# Altium PCB Layout_Dendrometro.PcbDoc (part 2 of 2)
Units mm, origin at the board's own origin, x right, y up, seen from the top; angles counter-clockwise.
Board outline 70 x 70 mm, 4 copper layers (L1 - TOP (Sig), L2 (GND), L3 (GND), L4 - BOT (Sig)), stack 0.603 mm thick; 138 components, 78 nets, 374 pads, 106 vias.
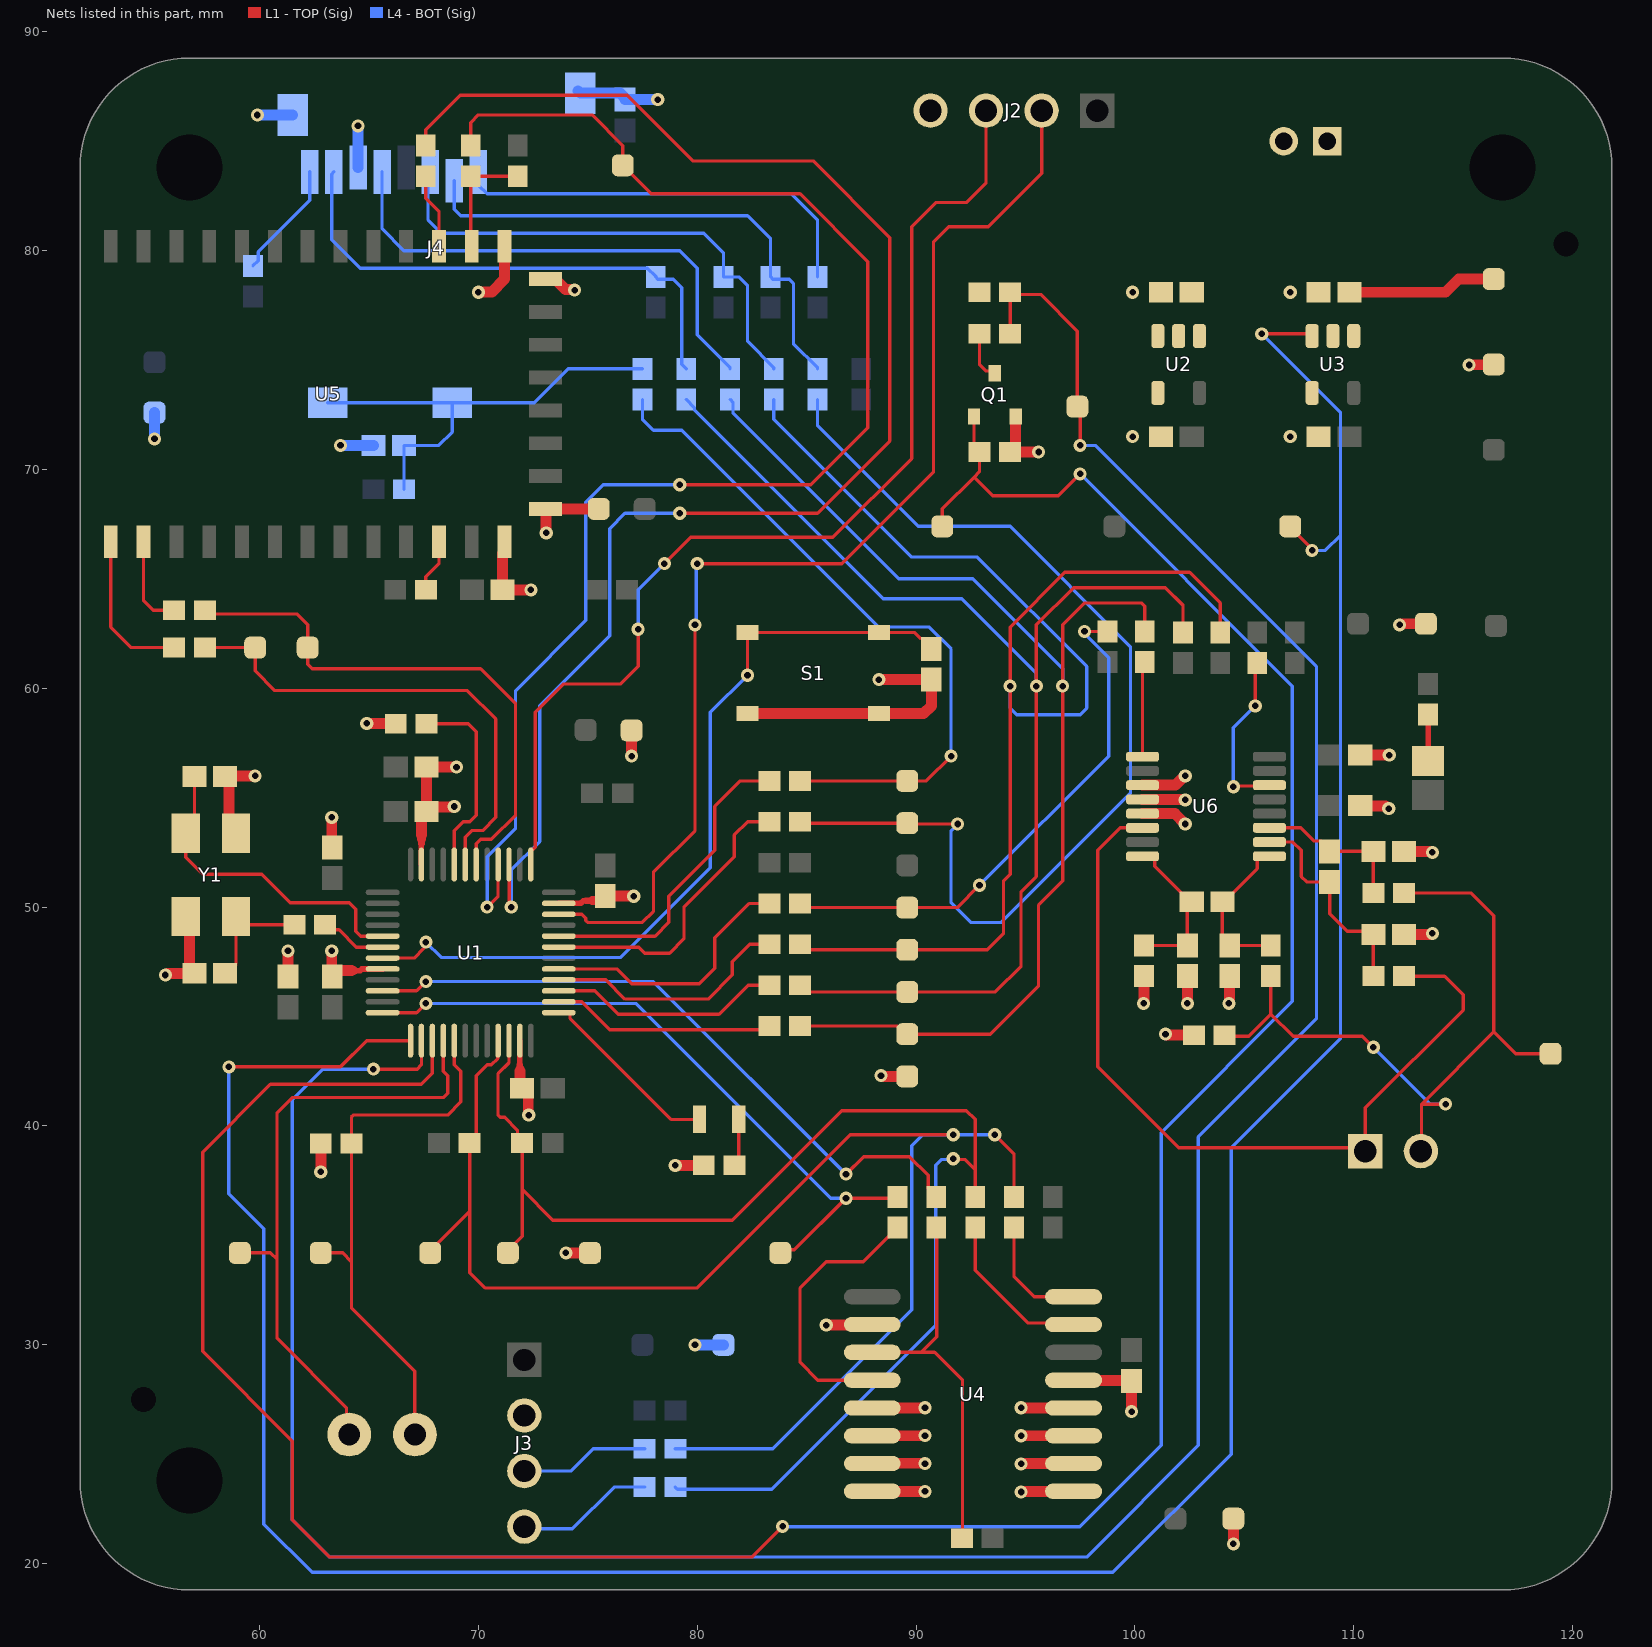
[diagram p4: the nets of this part, all layers, seen from the top]

## Via types
v1: diameter 0.6, hole 0.3, L1 - TOP (Sig) to L4 - BOT (Sig), tented top, 106 vias

## Nets (pads, with @x,y where several pads share a name; then routed paths per layer and width w, separated by ;. In a path a pad name is that pad's centre, name@x,y a point inside that pad or via, vN(x,y) a via of type N, cw(c..) or ccw(c..) an arc to the next point about the centre after c; other vN are vias at no path point) (continued)
ADS_DRDY: JP23.1 U6.14 | length 7.8
  L1 - TOP (Sig) w0.152: v1(104.5,55.5) 104.537,55.537 106.113,55.537 U6.14@106.15,55.575 ; v1(105.5,59.2) 105.5,61.05 JP23.1@105.6,61.15
  L4 - BOT (Sig) w0.152: v1(104.5,55.5) 104.5,58.2 v1(105.5,59.2)
ADS_SCLK: JP24.2 U6.1 | length 4.4
  L1 - TOP (Sig) w0.152: U6.1@100.35,56.875 100.35,61.1 JP24.2@100.45,61.2
AIN_N: C22.2 C26.1 R31.2 U6.11 | length 7.1
  L1 - TOP (Sig) w0.152: U6.11@106.15,53.625 107.575,53.625 108.176,53.024 108.501,53.024 108.9,52.625 C22.2@108.9,52.55 C26.1@110.9,52.55 R31.2@110.9,50.65
AIN_P: C22.1 C25.1 R27.2 U6.10 | length 10
  L1 - TOP (Sig) w0.152: U6.10@106.15,52.975 107.225,52.975 107.6,52.6 107.6,51.4 107.85,51.15 C22.1@108.9,51.15 108.9,49.7 109.7,48.9 110.75,48.9 C25.1@110.9,48.75 R27.2@110.9,46.85
BAT_SENSE: R1.2 R2.1 TP4.1 U1.14 | length 134.9
  L1 - TOP (Sig) w0.152: v1(65.2,42.6) 67.2,42.6 67.4,42.8 U1.14@67.4,43.9 ; R2.1@94.3,76.2 R1.2@94.3,78.1 94.4,78 95.7,78 97.375,76.325 TP4.1@97.375,72.875 97.5,72.75 v1(97.5,71.1)
  L4 - BOT (Sig) w0.152: v1(65.2,42.6) 62.889,42.6 62.8,42.511 62.8,42.5 61.5,41.2 61.5,22 63.2,20.3 97.8,20.3 102.9,25.4 102.9,39.5 108.3,44.9 108.3,61 98.2,71.1 v1(97.5,71.1)
BLE_EN: JP12.2 TP20.1 U1.40 | length 67.1
  L1 - TOP (Sig) w0.152: JP12.2@69.649,84.8 69.649,85.849 70,86.2 75.2,86.2 76.6,84.8 TP20.1@76.6,83.9 77.9,82.6 84.7,82.6 87.8,79.5 87.8,71.9 85.2,69.3 v1(79.2,69.3) ; v1(70.4,50) 70.9,50.5 U1.40@70.9,51.95
  L4 - BOT (Sig) w0.152: v1(70.4,50) 70.4,52.3 71.7,53.6 71.7,59.9 74.9,63.1 74.9,68.5 75.7,69.3 v1(79.2,69.3)
BLE_STATE: JP14.2 U1.39 | length 70.2
  L1 - TOP (Sig) w0.152: JP14.2@67.6,84.8 67.6,85.529 69.171,87.1 76.8,87.1 79.8,84.1 85.3,84.1 88.8,80.6 88.8,71.3 85.5,68 v1(79.2,68) ; U1.39@71.4,51.95 71.419,51.931 71.419,50.081 v1(71.5,50)
  L4 - BOT (Sig) w0.152: v1(71.5,50) 71.5,51.7 72.8,53 72.8,59.2 76,62.4 76,67.3 76.7,68 v1(79.2,68)
CARD_DET: JP16.2 R18.2 TP30.1 | length 31.6
  L1 - TOP (Sig) w0.152: R18.2@84.7,55.767 TP30.1@89.6,55.767 90.467,55.767 v1(91.6,56.9)
  L4 - BOT (Sig) w0.152: JP16.2@77.5,73.2 77.5,72.3 78,71.8 79.3,71.8 82.7,68.4 88.3,62.8 90.6,62.8 91.6,61.8 v1(91.6,56.9)
CARD_DET_MCU: R18.1 U1.32 | length 14.4
  L1 - TOP (Sig) w0.152: U1.32@73.675,48.675 78.075,48.675 78.7,49.3 78.7,50.5 80.8,52.6 80.8,54.6 81.967,55.767 R18.1@83.3,55.767
DEBUG_LED_A: D1.1 U1.25 | length 8.6
  L1 - TOP (Sig) w0.152: U1.25@73.675,45.175 74.144,45.175 74.189,45.13 74.189,44.911 78.8,40.3 D1.1@80.1,40.3
DEBUG_LED_K: D1.2 R32.1 | length 2.2
  L1 - TOP (Sig) w0.152: R32.1@81.7,38.2 81.9,38.4 D1.2@81.9,40.3
DL_LIM: C14.1 R4.1 Y1.3 | length 5.7
  L1 - TOP (Sig) w0.152: C14.1@58.425,46.975 58.5,46.975 58.925,47.4 Y1.3@58.925,49.575 59.3,49.2 R4.1@61.6,49.2
DS_INT: JP6.1 R8.2 U4.3 | length 17.9
  L1 - TOP (Sig) w0.152: U4.3@88,29.655 90.23,29.655 ; JP6.1@90.925,35.355 90.95,35.33 90.95,30.375 90.23,29.655 ; R8.2@92.1,21.155 92.125,21.18 92.125,28.375 90.845,29.655 90.23,29.655
DS_RST: JP9.1 U4.4 | length 12.7
  L1 - TOP (Sig) w0.152: U4.4@88,28.385 85.515,28.385 84.7,29.2 84.7,32.6 85.9,33.8 87.595,33.8 88.726,34.931 88.776,34.931 89.15,35.305 JP9.1@89.15,35.355
DS_SCL: JP5.2 U4.16 | length 5.5
  L1 - TOP (Sig) w0.152: JP5.2@94.475,35.355 94.475,33.125 95.405,32.195 U4.16@97.2,32.195
  L1 - TOP (Sig) w0.254: U4.16@97.12,32.275 U4.16@97.2,32.195
DS_SDA: JP8.2 U4.15 | length 7.5
  L1 - TOP (Sig) w0.152: JP8.2@92.7,35.355 92.7,33.4 95.1,31 97.125,31 U4.15@97.2,30.925
EN_3VA: TP7.1 U1.13 U3.3 | length 137.9
  L1 - TOP (Sig) w0.152: v1(58.6,42.7) 63.7,42.7 64.9,43.9 U1.13@66.9,43.9 ; v1(105.8,76.2) 108,76.2 U3.3@108.1,76.1 ; TP7.1@107.1,67.4 107.1,67.35 108.1,66.35 v1(108.1,66.3)
  L4 - BOT (Sig) w0.152: v1(58.6,42.7) 58.6,36.9 60.2,35.3 60.2,21.8 62.4,19.6 99,19.6 104.4,25 104.4,39 109.4,44 109.4,67 ; v1(105.8,76.2) 109.4,72.6 109.4,67 ; v1(108.1,66.3) 108.7,66.3 109.4,67
EN_BSENSE: Q1.1 R3.1 TP5.1 U1.15 | length 136.9
  L1 - TOP (Sig) w0.152: U1.15@67.9,43.9 67.9,42.4 67.4,41.9 60.5,41.9 57.4,38.8 57.4,29.7 61.5,25.6 61.5,22 63.2,20.3 82.5,20.3 v1(83.9,21.7) ; TP5.1@91.2,67.4 91.2,68.2 92.65,69.65 ; Q1.1@92.648,72.419 92.648,71.052 R3.1@92.9,70.8 92.9,69.9 92.65,69.65 ; v1(97.5,69.8) 96.5,68.8 93.5,68.8 92.65,69.65
  L4 - BOT (Sig) w0.152: v1(83.9,21.7) 83.921,21.679 97.479,21.679 101.2,25.4 101.2,39.7 107.2,45.7 107.2,60.1 v1(97.5,69.8)
EN_LIGHT_MON: R11.1 TP23.1 U1.16 | length 28.5
  L1 - TOP (Sig) w0.152: TP23.1@59.1,34.2 60.5,34.2 60.8,33.9 ; R11.1@64.1,25.9 63.971,26.029 63.971,27.129 60.8,30.3 60.8,33.9 ; U1.16@68.4,43.9 68.4,42.5 68.6,42.3 68.6,41.5 68.4,41.3 61.5,41.3 60.8,40.6 60.8,33.9
FB_AVDD: FB1.1 R26.2 | length 2.1
  L1 - TOP (Sig) w0.254: FB1.1@113.4,56.676 R26.2@113.4,58.8
GND: C1.2 C2.2 C3.2 C4.2 C5.2 C6.2 C7.2 C8.2 C9.2 C10.2 C11.2 C12.2 C13.2 C14.2 C15.2 C16.2 C17.2 C18.2 C19.2 C20.2 C23.2 C24.2 C25.2 C26.2 J1.2 J2.4 J3.2 J4.6 J4.11 J4.12 Q1.2 R3.2 R5.2 R12.2 R29.2 R30.2 R32.2 S1.3 S1.4 TP3.1 TP9.1 TP13.1 TP14.1 TP17.1 TP22.1 TP32.1 TP34.1 TP36.1 U1.8 U1.23 U1.35 U1.47 U2.2 U2.4 U3.2 U3.4 U4.2 U4.5 U4.6 U4.7 U4.8 U4.9 U4.10 U4.11 U4.12 U4.13 U5.13 U5.14 U5.21 U5.22 U6.3 U6.4 U6.5 Y1.2 Y1.4 | length 119.8
  L1 - TOP (Sig) w0.254: 64.4,47.1 64.6,47.1 64.673,47.173 65.623,47.173 U1.8@65.625,47.175 ; U1.47@67.4,51.95 67.4,52.9 ; 71.9,42.8 U1.23@71.9,43.9 ; U1.35@73.675,50.175 73.677,50.177 74.677,50.177 74.8,50.3 74.9,50.3
  L1 - TOP (Sig) w0.3: 64.3,47.1 64.4,47.1 ; 67.4,52.9 67.4,53.1 ; 71.9,42.6 71.9,42.8 ; 74.9,50.3 75.2,50.3
  L1 - TOP (Sig) w0.4: 64.2,47.1 64.3,47.1 ; 67.4,53.1 67.4,53.3 ; 71.9,42.5 71.9,42.6 ; 75.2,50.3 75.6,50.3 C10.2@75.8,50.5
  L1 - TOP (Sig) w0.5: v1(55.7,46.9) 55.727,46.9 55.802,46.975 C14.2@57.025,46.975 56.8,47.2 56.8,49.4 Y1.2@56.625,49.575 ; Y1.4@58.925,53.375 58.6,53.7 58.6,55.8 C13.2@58.425,55.975 58.437,55.988 59.788,55.988 v1(59.8,56) ; C12.2@61.3,46.825 v1(61.3,48) ; v1(62.8,37.9) R12.2@62.8,39.2 ; v1(63.3,48) 63.3,47.125 C6.2@63.325,46.825 63.325,46.875 63.55,47.1 64.2,47.1 ; v1(63.3,54.1) 63.3,53.025 C8.2@63.325,52.725 ; v1(64.9,58.4) 64.912,58.388 66.213,58.388 R5.2@66.225,58.375 ; 67.4,53.3 67.4,54.15 C7.2@67.625,54.375 ; v1(68.9,54.6) 68.881,54.581 67.831,54.581 C7.2@67.625,54.375 ; v1(69,56.4) C9.2@67.625,56.4 C7.2@67.625,54.375 ; v1(70,78.1) 70.019,78.119 70.619,78.119 71.2,78.7 U5.22@71.2,80.2 ; U5.13@71.2,66.7 71.2,66.267 71.1,66.167 C16.2@71.1,64.5 v1(72.4,64.5) ; 71.9,42.5 71.9,41.825 C11.2@72,41.725 72.056,41.725 72.281,41.5 72.281,40.519 v1(72.3,40.5) ; U5.21@73.075,78.7 73.143,78.632 73.575,78.632 73.988,78.219 74.381,78.219 v1(74.4,78.2) ; v1(73.1,67.1) 73.1,68.175 U5.14@73.075,68.2 TP22.1@75.5,68.2 ; v1(74,34.2) TP13.1@75.1,34.2 ; C10.2@75.8,50.5 v1(77.1,50.5) ; v1(77,56.9) TP9.1@77,58.075 ; v1(79,38.2) R32.2@80.3,38.2 ; S1.3@82.3,58.85 S1.4@88.3,58.85 90.35,58.85 90.7,59.2 C5.2@90.7,60.4 v1(88.3,60.4) ; v1(85.9,30.9) 85.913,30.913 87.987,30.913 U4.2@88,30.925 ; U4.8@88,23.305 88.002,23.303 90.397,23.303 v1@90.4,23.3 ; U4.7@88,24.575 88.012,24.587 90.388,24.587 v1@90.4,24.6 ; U4.6@88,25.845 90.318,25.845 90.373,25.9 v1@90.4,25.9 ; U4.5@88,27.115 88.003,27.118 90.407,27.118 v1(90.41,27.121) ; v1(88.4,42.3) 88.427,42.3 88.46,42.267 TP32.1@89.6,42.267 ; R3.2@94.3,70.8 v1(95.6,70.8) ; R3.2@94.553,71.003 Q1.2@94.553,72.419 ; v1(94.8,23.275) 94.815,23.29 97.185,23.29 U4.9@97.2,23.305 ; v1(94.8,24.558) 94.808,24.567 97.192,24.567 U4.10@97.2,24.575 U4.10@97.187,24.587 ; v1(94.8,25.842) 94.802,25.843 97.198,25.843 U4.11@97.2,25.845 ; v1(94.8,27.125) 94.81,27.115 U4.12@97.2,27.115 ; U4.13@97.2,28.385 97.215,28.37 99.835,28.37 C15.2@99.85,28.355 v1(99.85,26.95) ; U6.5@100.35,54.275 101.825,54.275 v1(102.3,53.8) ; U6.4@100.35,54.925 100.362,54.912 102.288,54.912 v1(102.3,54.9) ; U6.3@100.35,55.575 101.85,55.575 102.275,56 v1(102.3,56) ; v1(100.4,45.6) 100.408,45.608 100.408,46.842 R30.2@100.417,46.85 ; v1(101.4,44.2) 101.427,44.2 101.477,44.15 R29.2@102.7,44.15 ; v1(102.4,45.6) C23.2@102.4,46.85 ; v1(104.3,45.6) 104.3,45.627 104.333,45.66 C24.2@104.333,46.85 ; v1(104.5,20.9) TP17.1@104.5,22.055 ; C20.2@110.3,54.65 110.331,54.619 111.454,54.619 111.573,54.5 v1(111.6,54.5) ; C19.2@110.3,56.95 v1(111.623,56.95) ; v1(112.1,62.9) 112.127,62.9 112.177,62.95 TP36.1@113.3,62.95 ; C25.2@112.3,48.75 113.523,48.75 113.573,48.8 v1(113.6,48.8) ; C26.2@112.3,52.55 113.523,52.55 113.573,52.5 v1(113.6,52.5) ; v1(115.275,74.775) 115.287,74.788 116.388,74.788 TP3.1@116.4,74.8
  L4 - BOT (Sig) w0.5: v1(55.2,71.4) TP34.1@55.2,72.6 ; v1(59.9,86.2) J4.11@61.51,86.2 ; v1(63.7,71.1) C18.2@65.2,71.1 ; J4.6@64.5,83.8 v1(64.5,85.7) ; J4.12@74.56,87.3 J4.12@74.66,87.2 76.475,87.2 76.7,86.975 C17.2@76.7,86.9 v1(78.2,86.9) ; v1(79.9,30) TP14.1@81.2,30
  other v1: 90.41,23.3 90.41,24.574 90.41,25.848 99.9,71.5 107.1,71.5 99.9,78.1 107.1,78.1
HM10_EN: JP12.1 R10.2 U5.23 | length 5.4
  L1 - TOP (Sig) w0.152: U5.23@69.7,80.2 69.649,80.251 JP12.1@69.649,83.4 R10.2@71.8,83.4
HM10_RST: R9.2 U5.11 | length 2.4
  L1 - TOP (Sig) w0.152: R9.2@67.6,64.5 67.6,65.1 68.2,65.7 U5.11@68.2,66.7
HM10_RX: JP13.2 U5.2 | length 4.3
  L1 - TOP (Sig) w0.152: U5.2@54.7,66.7 54.7,64 55.136,63.563 JP13.2@56.1,63.563
HM10_STATE: JP14.1 U5.24 | length 3.4
  L1 - TOP (Sig) w0.152: JP14.1@67.6,83.4 67.6,82.4 68.2,81.8 U5.24@68.2,80.2
HM10_TX: JP11.2 U5.1 | length 7.2
  L1 - TOP (Sig) w0.152: U5.1@53.2,66.7 53.2,62.8 54.137,61.863 JP11.2@56.1,61.863
I2C_SCL: JP3.1 JP5.1 R6.2 TP11.1 U1.21 | length 67.2
  L1 - TOP (Sig) w0.152: TP11.1@67.8,34.3 69.6,36.1 ; U1.21@70.9,43.9 70.881,43.881 70.881,43.081 70.6,42.8 70.4,42.8 69.9,42.3 69.9,39.525 R6.2@69.6,39.225 69.6,36.1 ; v1(91.7,39.6) 87,39.6 80,32.6 70.3,32.6 69.6,33.3 69.6,36.1 ; v1(93.6,39.6) 94.475,38.725 JP5.1@94.475,36.755
  L4 - BOT (Sig) w0.152: JP3.1@79,25.25 83.45,25.25 89.8,31.6 89.8,39.1 90.3,39.6 v1(91.7,39.6) v1(93.6,39.6)
I2C_SDA: JP4.1 JP8.1 R7.2 TP12.1 U1.22 | length 62.2
  L1 - TOP (Sig) w0.152: TP12.1@71.35,34.3 72,34.95 72,37.1 ; U1.22@71.4,43.9 71.4,42.9 70.9,42.4 70.9,40.489 70.989,40.4 71.2,40.4 71.786,39.814 71.786,39.439 R7.2@72,39.225 72,37.1 ; v1(91.7,38.5) 91.729,38.471 92.229,38.471 92.7,38 ; JP8.1@92.7,36.755 92.7,38 ; 72,37.1 73.4,35.7 81.6,35.7 86.6,40.7 92.3,40.7 92.7,40.3 92.7,38
  L4 - BOT (Sig) w0.152: JP4.1@79,23.5 79.1,23.4 83.4,23.4 90.9,30.9 90.9,38.2 91.171,38.471 91.671,38.471 v1(91.7,38.5)
LIGHT_MON: R11.2 R12.1 TP24.1 U1.17 | length 25.5
  L1 - TOP (Sig) w0.152: TP24.1@62.8,34.2 63.8,34.2 64.2,33.8 ; R11.2@67.1,25.9 67.1,28.8 64.2,31.7 64.2,33.8 ; U1.17@68.9,43.9 68.9,42.8 69.2,42.5 69.2,41.1 68.6,40.5 64.289,40.5 64.2,40.411 R12.1@64.2,39.2 64.2,33.8
MCU_BOOT: R5.1 U1.44 | length 9.1
  L1 - TOP (Sig) w0.152: R5.1@67.625,58.375 69.536,58.375 69.9,58.011 69.9,54.2 69.6,53.9 69.3,53.9 68.9,53.5 U1.44@68.9,51.95
MCU_OSC_IN: C13.1 U1.5 Y1.1 | length 14.9
  L1 - TOP (Sig) w0.152: C13.1@57.025,55.975 57.025,53.775 Y1.1@56.625,53.375 56.625,52.275 57.4,51.5 60.1,51.5 61.4,50.2 64.1,50.2 64.4,49.9 64.4,48.9 64.625,48.675 U1.5@65.625,48.675
MCU_OSC_OUT: R4.2 U1.6 | length 3.1
  L1 - TOP (Sig) w0.152: R4.2@63,49.3 63.334,48.966 63.634,48.966 64.425,48.175 U1.6@65.625,48.175
MCU_RESET: C5.1 S1.1 S1.2 U1.7 | length 37.6
  L1 - TOP (Sig) w0.152: U1.7@65.625,47.675 67.075,47.675 67.514,48.114 67.514,48.314 v1(67.6,48.4) ; v1(82.3,60.6) S1.1@82.3,62.55 S1.2@88.3,62.55 89.95,62.55 90.226,62.274 90.301,62.274 90.7,61.875 C5.1@90.7,61.8
  L4 - BOT (Sig) w0.152: v1(67.6,48.4) 68.3,47.7 76.5,47.7 80.6,51.8 80.6,58.9 v1(82.3,60.6)
REF_N: C21.2 C23.1 R30.1 U6.8 | length 7.4
  L1 - TOP (Sig) w0.152: U6.8@100.35,52.325 100.765,52.325 100.911,52.179 100.911,51.864 102.525,50.25 C21.2@102.6,50.25 102.4,50.05 C23.1@102.4,48.25 R30.1@100.417,48.25
REF_P: C21.1 C24.1 R28.1 U6.9 | length 7.3
  L1 - TOP (Sig) w0.152: U6.9@106.15,52.325 105.735,52.325 105.589,52.179 105.589,51.764 104.075,50.25 C21.1@104,50.25 104,48.583 C24.1@104.333,48.25 R28.1@106.217,48.25
RTC_INT: JP6.2 U1.10 | length 30.6
  L1 - TOP (Sig) w0.152: U1.10@65.625,46.175 67.175,46.175 v1(67.6,46.6) ; v1(86.8,37.8) 87.6,38.6 89.7,38.6 90.551,37.749 90.551,37.129 JP6.2@90.925,36.755
  L4 - BOT (Sig) w0.152: v1(67.6,46.6) 78,46.6 v1(86.8,37.8)
RTC_RST: JP9.2 TP16.1 U1.12 | length 31.4
  L1 - TOP (Sig) w0.152: U1.12@65.625,45.175 67.175,45.175 v1(67.6,45.6) ; TP16.1@83.8,34.2 83.939,34.339 84.439,34.339 v1(86.8,36.7) 89.095,36.7 JP9.2@89.15,36.755
  L4 - BOT (Sig) w0.152: v1(67.6,45.6) 77.2,45.6 86.1,36.7 v1(86.8,36.7)
RX_MCU: JP11.1 TP19.1 U1.43 | length 22.8
  L1 - TOP (Sig) w0.152: JP11.1@57.5,61.863 TP19.1@59.8,61.863 59.8,60.8 60.7,59.9 69.5,59.9 70.8,58.6 70.8,54.1 70.2,53.5 69.7,53.5 69.4,53.2 U1.43@69.4,51.95
SD_CD: C18.1 J4.9 J4.10 JP16.1 R25.2 | length 20.8
  L4 - BOT (Sig) w0.152: J4.9@63.11,73.05 J4.10@68.81,73.05 ; R25.2@66.6,69.1 C18.1@66.6,71.1 68.2,71.1 68.81,71.71 J4.10@68.81,73.05 ; JP16.1@77.5,74.6 74.1,74.6 72.55,73.05 J4.10@68.81,73.05
SD_CLK: J4.5 JP19.2 | length 23
  L4 - BOT (Sig) w0.152: J4.5@65.6,83.6 65.6,81 66.6,80 79.2,80 80,79.2 80,76.15 81.5,74.65 JP19.2@81.5,74.6
SD_CMD: J4.3 JP18.2 R21.2 | length 23
  L4 - BOT (Sig) w0.152: J4.3@67.8,83.6 67.7,83.5 67.7,81.4 68.3,80.8 80.3,80.8 81.2,79.9 R21.2@81.2,78.8 81.9,78.8 82.3,78.4 82.3,75.85 83.5,74.65 JP18.2@83.5,74.6
SD_DAT0: J4.7 JP17.2 R22.2 | length 23.9
  L4 - BOT (Sig) w0.152: J4.7@63.4,83.6 63.3,83.5 63.3,80.5 64.6,79.2 77.726,79.2 78.1,78.826 R22.2@78.1,78.8 78.2,78.7 78.9,78.7 79.3,78.3 79.3,74.8 JP17.2@79.5,74.6
SD_DAT1: J4.8 R24.2 | length 5.4
  L4 - BOT (Sig) w0.152: R24.2@59.7,79.3 59.939,79.539 59.939,79.939 62.3,82.3 J4.8@62.3,83.6
SD_DAT2: J4.1 R23.2 | length 19.4
  L4 - BOT (Sig) w0.152: J4.1@70,83.6 70,83 70.4,82.6 84.3,82.6 85.5,81.4 R23.2@85.5,78.8
SD_DAT3: J4.2 JP20.2 R20.2 | length 23.6
  L4 - BOT (Sig) w0.152: J4.2@68.9,83.2 68.9,81.9 69.2,81.6 82.3,81.6 83.35,80.55 R20.2@83.35,78.8 83.45,78.7 84.2,78.7 84.4,78.5 84.4,75.75 85.5,74.65 JP20.2@85.5,74.6
SHT_SCL: J3.3 JP3.2 | length 5.9
  L4 - BOT (Sig) w0.152: J3.3@72.1,24.23 74.23,24.23 75.25,25.25 JP3.2@77.6,25.25
SHT_SDA: J3.4 JP4.2 | length 6.3
  L4 - BOT (Sig) w0.152: J3.4@72.1,21.69 72.19,21.6 74.3,21.6 76.2,23.5 JP4.2@77.6,23.5
SPI_CLK: JP19.1 JP24.1 R15.2 TP27.1 | length 55.7
  L1 - TOP (Sig) w0.152: R15.2@84.7,44.567 89.135,44.567 89.506,44.195 TP27.1@89.6,44.195 93.395,44.195 95.6,46.4 95.6,50.1 96.7,51.2 v1(96.7,60.1) 96.7,62.9 97.7,63.9 100.3,63.9 100.45,63.75 JP24.1@100.45,62.6
  L4 - BOT (Sig) w0.152: JP19.1@81.5,73.2 81.639,73.061 81.639,72.561 89.2,65 92.6,65 96.7,60.9 v1(96.7,60.1)
SPI_CLK_MCU: R15.1 U1.26 | length 10.2
  L1 - TOP (Sig) w0.152: U1.26@73.675,45.675 74.725,45.675 76,44.4 83.133,44.4 R15.1@83.3,44.567
SPI_CS_ADC: JP25.1 R17.2 TP29.1 | length 24.2
  L1 - TOP (Sig) w0.152: R17.2@84.7,50.167 84.886,49.981 TP29.1@89.6,49.981 91.881,49.981 v1(92.9,51) ; v1(97.7,62.6) JP25.1@98.75,62.6
  L4 - BOT (Sig) w0.152: v1(92.9,51) 98.8,56.9 98.8,61.387 97.7,62.487 v1(97.7,62.6)
SPI_CS_ADC_MCU: R17.1 U1.29 | length 12.2
  L1 - TOP (Sig) w0.152: U1.29@73.675,47.175 76.325,47.175 77,46.5 80.1,46.5 80.8,47.2 80.8,48.6 82.367,50.167 R17.1@83.3,50.167
SPI_CS_SD: JP20.1 R16.2 TP28.1 | length 48.4
  L1 - TOP (Sig) w0.152: R16.2@84.7,53.9 84.762,53.838 TP28.1@89.6,53.838 89.638,53.8 v1(91.9,53.8)
  L4 - BOT (Sig) w0.152: JP20.1@85.5,73.2 85.5,72 90.1,67.4 94.3,67.4 99.8,61.9 99.8,55.2 93.9,49.3 92.5,49.3 91.6,50.2 91.6,53.487 91.9,53.787 v1(91.9,53.8)
SPI_CS_SD_MCU: R16.1 U1.31 | length 13.7
  L1 - TOP (Sig) w0.152: U1.31@73.675,48.175 77.325,48.175 77.6,47.9 78.736,47.9 79.394,48.558 79.394,49.994 81.7,52.3 81.7,53.3 82.3,53.9 R16.1@83.3,53.9
SPI_MISO: JP17.1 JP21.1 R13.2 TP25.1 | length 57.4
  L1 - TOP (Sig) w0.152: R13.2@84.7,46.433 85.01,46.124 TP25.1@89.6,46.124 93.624,46.124 94.8,47.3 94.8,50.7 95.5,51.4 v1(95.5,60.1) 95.5,62.9 97.2,64.6 101.4,64.6 102.2,63.8 JP21.1@102.2,62.55
  L4 - BOT (Sig) w0.152: JP17.1@79.5,73.2 79.874,72.826 79.874,72.726 88.5,64.1 92.1,64.1 95.5,60.7 v1(95.5,60.1)
SPI_MISO_MCU: R13.1 U1.27 | length 10.6
  L1 - TOP (Sig) w0.152: U1.27@73.675,46.175 75.325,46.175 76.4,45.1 81,45.1 82.333,46.433 R13.1@83.3,46.433
SPI_MOSI: JP18.1 JP22.1 R14.2 TP26.1 | length 62.9
  L1 - TOP (Sig) w0.152: R14.2@84.7,48.3 84.948,48.052 TP26.1@89.6,48.052 93.252,48.052 94,48.8 94,51.2 94.3,51.5 v1(94.3,60.1) 94.3,62.8 96.8,65.3 102.5,65.3 103.9,63.9 JP22.1@103.9,62.55
  L4 - BOT (Sig) w0.152: JP18.1@83.5,73.2 83.5,72.3 89.8,66 92.8,66 97.8,61 97.8,59.1 97.5,58.8 94.6,58.8 94.3,59.1 v1(94.3,60.1)
SPI_MOSI_MCU: R14.1 U1.28 | length 11.4
  L1 - TOP (Sig) w0.152: U1.28@73.675,46.675 75.825,46.675 76.7,45.8 80.5,45.8 81.6,46.9 81.6,47.5 82.4,48.3 R14.1@83.3,48.3
SW_DRAIN: Q1.3 R2.2 | length 2.3
  L1 - TOP (Sig) w0.152: R2.2@92.9,76.2 92.9,74.8 93.2,74.5 93.5,74.5 Q1.3@93.6,74.4
SWCLK: J2.3 U1.37 | length 49.2
  L1 - TOP (Sig) w0.152: U1.37@72.4,51.95 72.4,52.574 72.475,52.649 72.511,52.649 72.6,52.738 72.6,58.9 73.9,60.2 76.5,60.2 77.3,61 v1(77.3,62.7) ; v1(78.5,65.7) 79.7,66.9 86.2,66.9 89.8,70.5 89.8,81.1 90.9,82.2 92.3,82.2 93.2,83.1 J2.3@93.2,86.4
  L4 - BOT (Sig) w0.152: v1(77.3,62.7) 77.3,64.5 v1(78.5,65.7)
SWDIO: J2.2 U1.34 | length 53.6
  L1 - TOP (Sig) w0.152: U1.34@73.675,49.675 74.725,49.675 74.9,49.5 74.9,49.389 74.989,49.3 77.5,49.3 78,49.8 78,51.6 79.9,53.5 v1(79.9,62.9) ; v1(80,65.7) 86.6,65.7 90.8,69.9 90.8,80.4 91.4,81 91.4,81.011 91.489,81.1 93.3,81.1 95.74,83.54 J2.2@95.74,86.4
  L4 - BOT (Sig) w0.152: v1(79.9,62.9) 79.95,62.95 79.95,65.65 v1(80,65.7)
TX_MCU: JP13.1 TP21.1 U1.42 | length 25.4
  L1 - TOP (Sig) w0.152: JP13.1@57.5,63.563 57.664,63.4 61.7,63.4 62.2,62.9 TP21.1@62.2,61.863 62.2,61.1 62.4,60.9 70.1,60.9 71.7,59.3 71.7,54.2 70.6,53.1 70.1,53.1 69.9,52.9 U1.42@69.9,51.95
VIN: C1.1 C3.1 J1.1 R1.1 TP1.1 U2.1 U2.3 U3.1 | length 6.8
  L1 - TOP (Sig) w0.5: C3.1@109.8,78.1 114.2,78.1 114.8,78.7 TP1.1@116.4,78.7
VSENSE_N: J5.2 R28.2 R29.1 R31.1 TP38.1 | length 34
  L1 - TOP (Sig) w0.152: R29.1@104.1,44.15 104.15,44.1 105.2,44.1 106.217,45.117 ; R28.2@106.217,46.85 106.217,45.117 ; v1(110.9,43.6) 110.4,44.1 107.233,44.1 106.217,45.117 ; R31.1@112.3,50.65 115.35,50.65 116.4,49.6 116.4,44.3 ; J5.2@113.1,39.602 113.1,41 ; v1(114.2,41) 113.1,41 ; TP38.1@119,43.3 117.4,43.3 116.4,44.3 ; 113.1,41 116.4,44.3
  L4 - BOT (Sig) w0.152: v1(110.9,43.6) 113.5,41 v1(114.2,41)
VSENSE_P: J5.1 R27.1 U6.6 | length 38.3
  L1 - TOP (Sig) w0.152: U6.6@100.35,53.625 99.325,53.625 98.3,52.6 98.3,42.7 102,39 110.38,39 J5.1@110.53,38.85 110.53,40.83 115,45.3 115,46 114.15,46.85 R27.1@112.3,46.85
pads on no net: U1.2 U1.3 U1.4 U1.11 U1.18 U1.19 U1.20 U1.33 U1.38 U1.41 U1.45 U1.46 U4.1 U5.3 U5.4 U5.5 U5.6 U5.7 U5.8 U5.9 U5.10 U5.15 U5.16 U5.17 U5.18 U5.19 U5.20 U5.25 U5.26 U5.27 U5.28 U5.29 U5.30 U5.31 U5.32 U5.33 U5.34 U6.7

## Polygon pours and split planes (outlines as drawn)
VIN on L1 - TOP (Sig) "NONET_L01_P-001" (solid, pour order 1): 108.638,79.962 109.175,79.425 109.175,77.425 109.4,77.2 109.6,77.2 109.6,75.5 110.4,75.5 110.4,77.2 110.65,77.45 110.7,77.4 111.8,77.4 112,77.6 112,78.8 112,81.2 112,86.4 111.3,87.1 108.3,87.1 107.7,86.5 107.7,79.962
VIN on L1 - TOP (Sig) "NONET_L01_P-001" (solid, pour order 11): 98.2,79.2 98.701,78.7 98.85,78.7 98.85,83.509 98.863,83.5 99.2,83.5 99.2,83.9 99.175,83.925 97.825,83.925 97.5,83.6 95,81.1 95,80.636 94.706,80.35 93.05,80.35 92.6,79.9 92.6,77.9 93.2,77.9 93.2,78.8 93.6,79.2
+3V_MCU on L1 - TOP (Sig) "NONET_L01_P-001" (solid, pour order 10): 73.2,57.1 73.4,57.3 74.6,57.3 74.6,58.3 75.2,58.3 75.2,57.3 75.5,57.3 75.7,57.1 75.7,53.9 76.6,53.9 77.1,53.4 77.1,51.5 76.9,51.3 74.8,51.3 74.5,51 74.5,50.5 73.2,50.5
+3V_MCU on L1 - TOP (Sig) "NONET_L01_P-001" (solid, pour order 9): 72.9,37.8 73.1,37.6 74.8,37.6 75,37.8 75,43.1 73.3,44.8 72.2,44.8 72.2,43.1 72.3,43 72.9,43
GND on L1 - TOP (Sig) "NONET_L01_P-001" (solid, pour order 6): 101.775,70.5 101.475,70.2 99.525,70.2 99.275,70.45 99.275,72.275 99.5,72.5 100.675,72.5 100.675,74.2 101.675,75.2 101.675,76.7 101.275,77.1 99.475,77.1 99.275,77.3 99.275,79.425 99.675,79.825 101.45,79.825 101.775,79.5 101.775,77.45 102.375,76.85 102.375,74.9 101.375,73.9 101.375,72.5 101.525,72.5 101.771,72.254 101.775,72.254
+3V on L1 - TOP (Sig) "NONET_L01_P-001" (solid, pour order 8): 102.275,72.5 102.025,72.25 102.025,70.5 102.325,70.2 105.1,70.2 105.3,70.4 105.3,72.325 105.125,72.5 103.425,72.5 103.325,72.6 103.325,74.1 102.525,74.1 102.525,72.5
VIN on L1 - TOP (Sig) "NONET_L01_P-001" (solid, pour order 7): 100.675,75.55 100.675,76.15 100.525,76.3 99.325,76.3 99.312,76.313 98.6,77.025 98.6,83.675 98.7,83.775 99,83.925 102.367,83.925 102.367,79.5 102,79.5 101.712,79.787 99.475,79.625 99.425,77.15 101.475,77.15 101.475,75.55
VIN on L1 - TOP (Sig) "NONET_L01_P-001" (solid, pour order 5): 101.994,77.506 102.175,77.325 102.45,77.325 102.65,77.125 102.65,75.55 103.3,75.55 103.3,77.125 103.675,77.5 106.3,77.5 106.3,79.4 106.7,79.8 108.2,79.8 107.7,80.3 107.7,83.942 102.367,83.942 102.029,83.604
GND on L1 - TOP (Sig) "NONET_L01_P-001" (solid, pour order 2): 108.65,79.95 109,79.6 109,77.6 109.4,77.2 109.4,75.1 108.4,74.1 108.4,72.7 108.5,72.6 108.8,72.6 108.95,72.45 108.95,70.35 108.8,70.2 106.525,70.2 106.3,70.425 106.3,72.375 106.525,72.6 107.6,72.6 107.7,72.7 107.7,74.4 108.7,75.4 108.7,76.9 108.5,77.1 106.7,77.1 106.3,77.5 106.3,79.4 106.85,79.95
+3VA on L1 - TOP (Sig) "NONET_L01_P-001" (solid, pour order 3): 109.6,72.6 109.6,74.1 110.4,74.1 110.4,72.6 110.5,72.5 112.4,72.5 112.7,72.2 112.7,70.5 112.4,70.2 109.4,70.2 109.2,70.4 109.2,72.6
+3V_MCU on L1 - TOP (Sig) "NONET_L01_P-001" (solid, pour order 0): 64.2,56.6 64.8,57.5 66.8,57.5 66.8,53.5 66.9,53.233 66.9,50.8 66.8,50.7 62.2,50.7 62.2,54.05 62.9,55.1 64.2,55.1
GND on L2 (GND) (split plane): 117.094,88.282 117.386,88.253 117.676,88.206 117.963,88.139 118.244,88.053 118.519,87.95 118.787,87.829 119.046,87.69 119.296,87.535 119.534,87.364 119.762,87.177 119.976,86.976 120.177,86.762 120.364,86.534 120.535,86.296 120.69,86.046 120.829,85.787 120.95,85.519 121.053,85.244 121.139,84.963 121.206,84.676 121.253,84.386 121.282,84.094 121.291,83.818 121.29,83.8 121.29,23.8 121.291,23.782 121.282,23.506 121.253,23.214 121.206,22.924 121.139,22.637 121.053,22.356 120.95,22.081 120.829,21.813 120.69,21.554 120.535,21.304 120.364,21.066 120.177,20.838 119.976,20.624 119.762,20.423 119.534,20.236 119.296,20.065 119.046,19.91 118.787,19.771 118.519,19.65 118.244,19.547 117.963,19.461 117.676,19.394 117.386,19.347 117.094,19.318 116.818,19.309 116.8,19.31 56.8,19.31 56.782,19.309 56.506,19.318 56.214,19.347 55.924,19.394 55.637,19.461 55.356,19.547 55.081,19.65 54.813,19.771 54.554,19.91 54.304,20.065 54.066,20.236 53.838,20.423 53.624,20.624 53.423,20.838 53.236,21.066 53.065,21.304 52.91,21.554 52.771,21.813 52.65,22.081 52.547,22.356 52.461,22.637 52.394,22.924 52.347,23.214 52.318,23.506 52.309,23.782 52.31,23.8 52.31,83.8 52.309,83.818 52.318,84.094 52.347,84.386 52.394,84.676 52.461,84.963 52.547,85.244 52.65,85.519 52.771,85.787 52.91,86.046 53.065,86.296 53.236,86.534 53.423,86.762 53.624,86.976 53.838,87.177 54.066,87.364 54.304,87.535 54.554,87.69 54.813,87.829 55.081,87.95 55.356,88.053 55.637,88.139 55.924,88.206 56.214,88.253 56.506,88.282 56.782,88.291 56.8,88.29 116.8,88.29 116.818,88.291
GND on L3 (GND) (split plane): 117.094,88.282 117.386,88.253 117.676,88.206 117.963,88.139 118.244,88.053 118.519,87.95 118.787,87.829 119.046,87.69 119.296,87.535 119.534,87.364 119.762,87.177 119.976,86.976 120.177,86.762 120.364,86.534 120.535,86.296 120.69,86.046 120.829,85.787 120.95,85.519 121.053,85.244 121.139,84.963 121.206,84.676 121.253,84.386 121.282,84.094 121.291,83.818 121.29,83.8 121.29,23.8 121.291,23.782 121.282,23.506 121.253,23.214 121.206,22.924 121.139,22.637 121.053,22.356 120.95,22.081 120.829,21.813 120.69,21.554 120.535,21.304 120.364,21.066 120.177,20.838 119.976,20.624 119.762,20.423 119.534,20.236 119.296,20.065 119.046,19.91 118.787,19.771 118.519,19.65 118.244,19.547 117.963,19.461 117.676,19.394 117.386,19.347 117.094,19.318 116.818,19.309 116.8,19.31 56.8,19.31 56.782,19.309 56.506,19.318 56.214,19.347 55.924,19.394 55.637,19.461 55.356,19.547 55.081,19.65 54.813,19.771 54.554,19.91 54.304,20.065 54.066,20.236 53.838,20.423 53.624,20.624 53.423,20.838 53.236,21.066 53.065,21.304 52.91,21.554 52.771,21.813 52.65,22.081 52.547,22.356 52.461,22.637 52.394,22.924 52.347,23.214 52.318,23.506 52.309,23.782 52.31,23.8 52.31,83.8 52.309,83.818 52.318,84.094 52.347,84.386 52.394,84.676 52.461,84.963 52.547,85.244 52.65,85.519 52.771,85.787 52.91,86.046 53.065,86.296 53.236,86.534 53.423,86.762 53.624,86.976 53.838,87.177 54.066,87.364 54.304,87.535 54.554,87.69 54.813,87.829 55.081,87.95 55.356,88.053 55.637,88.139 55.924,88.206 56.214,88.253 56.506,88.282 56.782,88.291 56.8,88.29 116.8,88.29 116.818,88.291

## Silkscreen, mask and mechanical layers (free items; w line width, h text height)
Top Overlay:
  lines w0.254: 52.6,60.2 63.9,60.2 65.1,61.4 72.1,61.4 74.1,63.4 78.9,63.4 80.4,64.9 80.4,87.6 80.4,88 ; 60.2,19.2 60.2,30.3 62,32.1 81.1,32.1 ; 83.2,19.2 83.2,30 81.1,32.1 ; 96,40.5 96,64 96,64.4 ; 102.3,87.8 102.3,83.5 98.2,79.4 89.4,79.4 87.6,77.6 87.6,66 89.2,64.4 96,64.4 ; 106.2,19.4 106.2,35.5 101.3,40.4 96.5,40.4 89,40.4 85.6,37 82.1,37 81.1,36 81.1,32.1 ; 120.9,68.9 115.4,68.9 110.7,68.9 108.9,67.1 108.9,65.7 108.3,65.1 96.7,65.1 96,64.4
  text "BLE Conn" at 60.65,86.35 h1
  text "EN" at 75.75,84.95 h1
  text "GND" at 90.15,84.55 h1 r270
  text "SWCLK" at 92.75,84.55 h1 r270
  text "SWDIO" at 95.35,84.55 h1 r270
  text "+3V" at 97.75,84.55 h1 r270
  text "SWD" at 84.65,83.65 h1
  text "VIN" at 111.25,83.35 h1
  text "Prog" at 84.25,81.883 h1
  text "+" at 108.55,81.783 h1
  text "-" at 106.25,81.75 h1
  text "VIN" at 115.15,79.75 h1
  text "PWR MGMT" at 119.45,78.25 h1 r270
  text "GND" at 115.15,75.85 h1
  text "BAT" at 96.125,74.025 h1
  text "+3V" at 77.05,72.05 h1 r270
  text "+3VA" at 114.55,72.05 h1
  text "GND" at 75.05,72.025 h1 r270
  text "+3V" at 97.65,68.35 h1
  text "EN3VA" at 104.25,68.35 h1
  text "+3VA" at 116.05,67.7 h1 r270
  text "+3V" at 109.75,66.85 h1 r270
  text "GND" at 112.75,66.8 h1 r270
  text "ENBAT" at 89.05,65.35 h1
  text "RX" at 59.05,63.05 h1
  text "TX" at 61.55,63.05 h1
  text "+3V" at 74.35,62.05 h1 r270
  text "GND" at 76.55,61.925 h1 r270
  text "SDCD" at 90.65,55.217 h1
  text "SDCS" at 90.65,53.317 h1
  text "DRDY" at 90.65,51.517 h1
  text "ADCCS" at 90.65,49.617 h1
  text "Sense" at 118.75,49.15 h1 r270
  text "MOSI" at 90.65,47.617 h1
  text "MISO" at 90.65,45.617 h1
  text "CLK" at 90.65,43.717 h1
  text "Debug" at 78.85,41.983 h1
  text "GND" at 90.75,41.817 h1
  text "Flex Sensor" at 117.85,39.25 h1 r270
  text "EN" at 58.25,35.35 h1
  text "SCL" at 66.5,35.35 h1
  text "SDA" at 70,35.35 h1
  text "GND" at 73.85,35.35 h1
  text "LGT" at 61.55,35.25 h1
  text "RST" at 82.55,35.15 h1
  text "RTC" at 99.15,34.85 h1
  text "Temp" at 76.35,27.283 h1
  text "+3V" at 101.25,25.75 h1 r270
  text "GND" at 103.95,25.75 h1 r270
  text "%HR" at 76.85,25.15 h1
  text "Sensor" at 75.85,23.45 h1
  text "Light" at 63.65,21.883 h1
  text "Sensor" at 63.15,20.05 h1
Bottom Overlay:
  drawing of 69 lines, arcs and shapes, not listed
  text "+3V" at 59.05,74.45 h1
  text "GND" at 58.95,72.05 h1
  text "Datalogging" at 90.65,68.283 h1
  text "Dendrometro" at 90.45,55.45 h1
  text "Autor: Ramos Leonardo" at 90.55,53.45 h1
  text "Rev: 1.0" at 90.55,51.45 h1
  text "UNSAM" at 73.95,45.45 h1
  text "+3v" at 78.85,31.25 h1
  text "GND" at 82.65,31.25 h1
  text "SHT30" at 81.05,20.35 h1
Mechanical 1:
  the board outline again, w0.254